# Altium PCB CZ101_Weld_V1.0.PcbDoc
Units mm, origin at the board's own origin, x right, y up, seen from the top; angles counter-clockwise.
Board outline 46 x 48 mm, 2 copper layers (Top Layer, Bottom Layer); 51 components, 31 nets, 122 pads, 0 vias.
Unrouted connection lines stored in the file: 86.
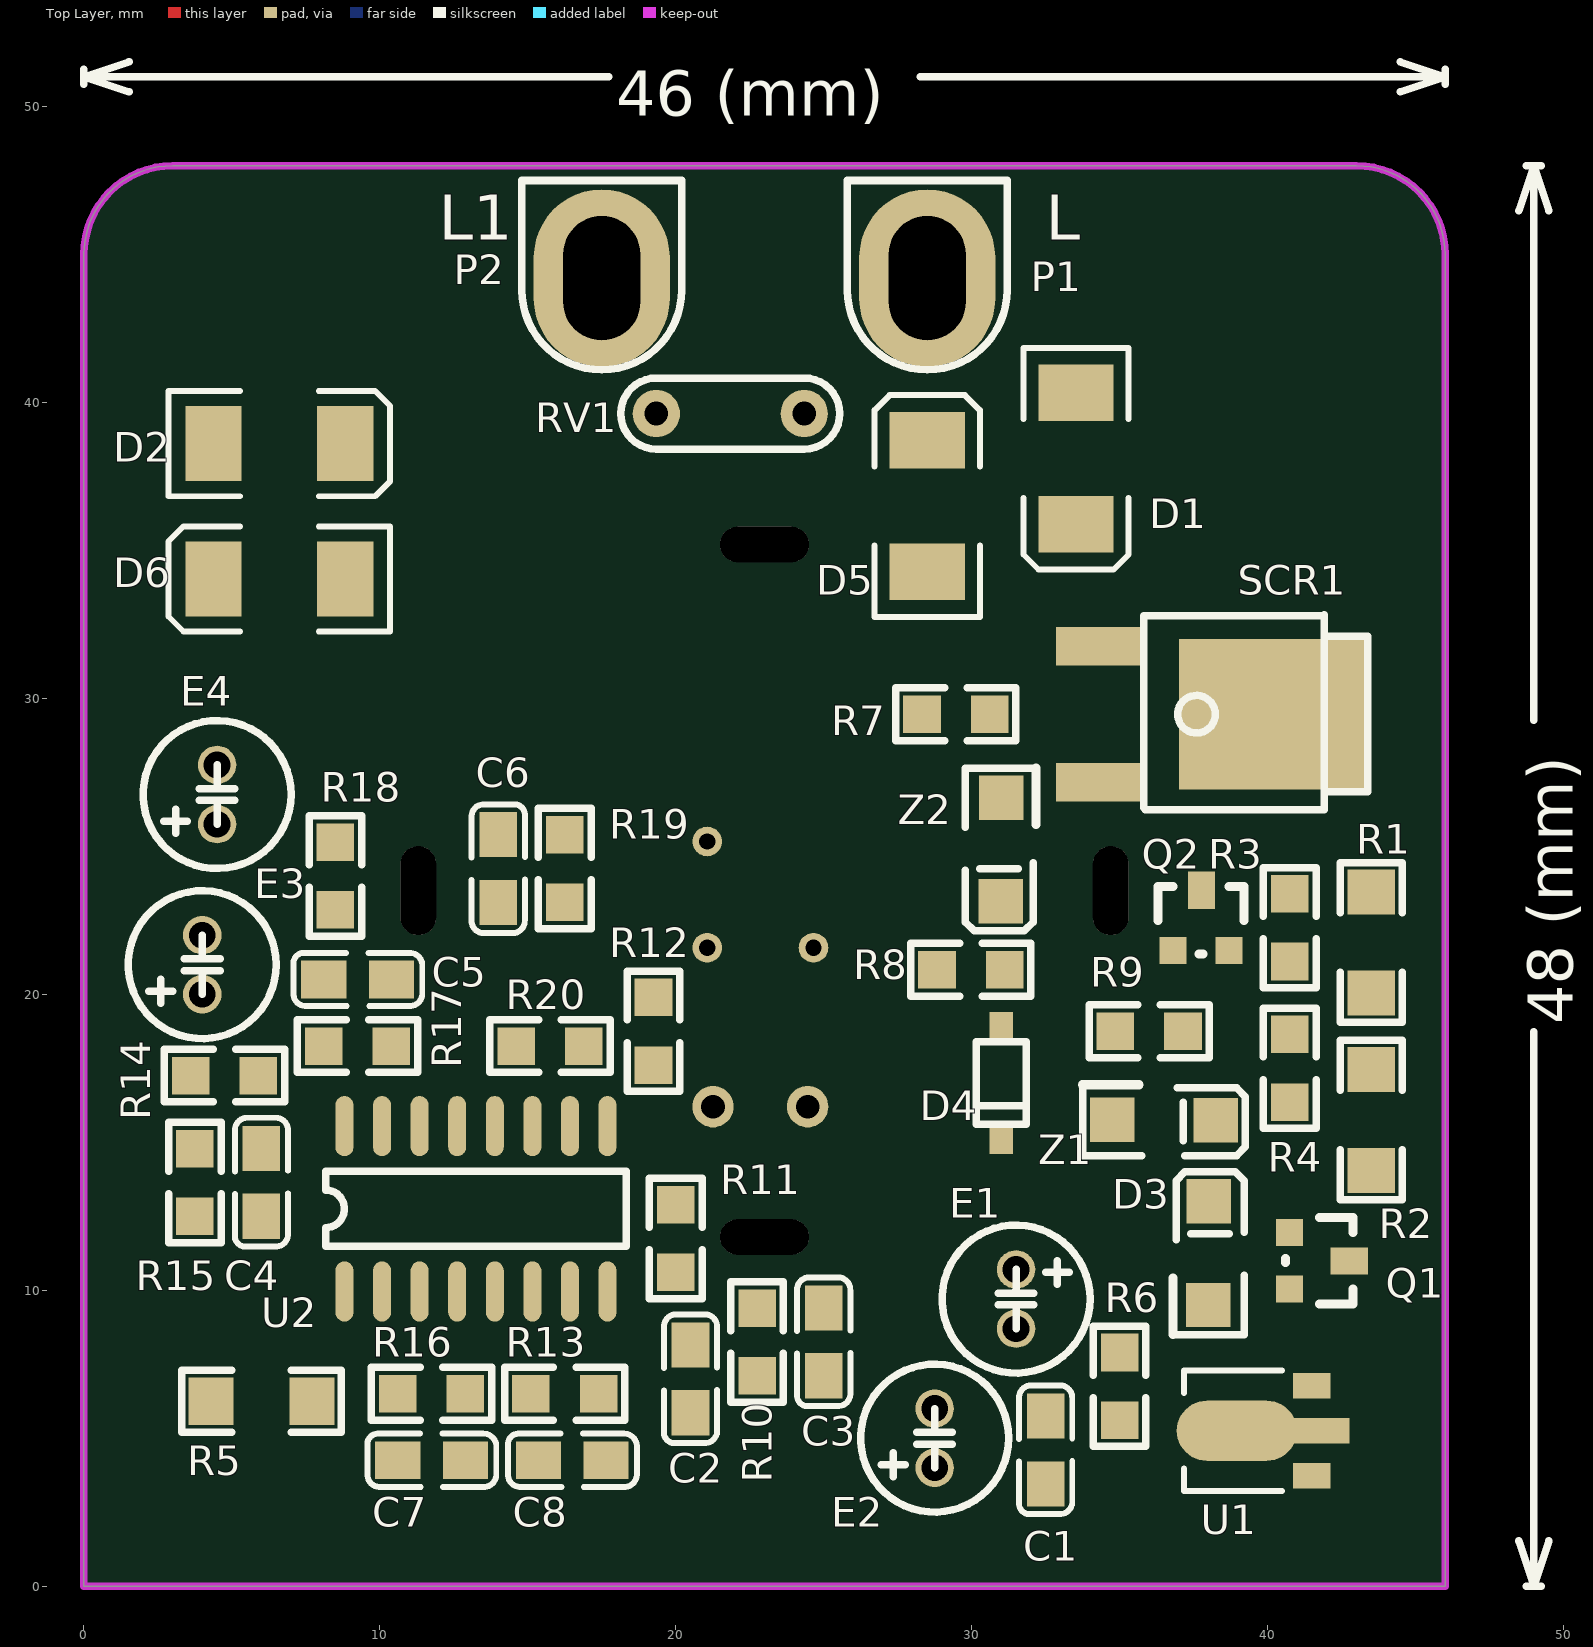
[diagram p0: Top Layer view]
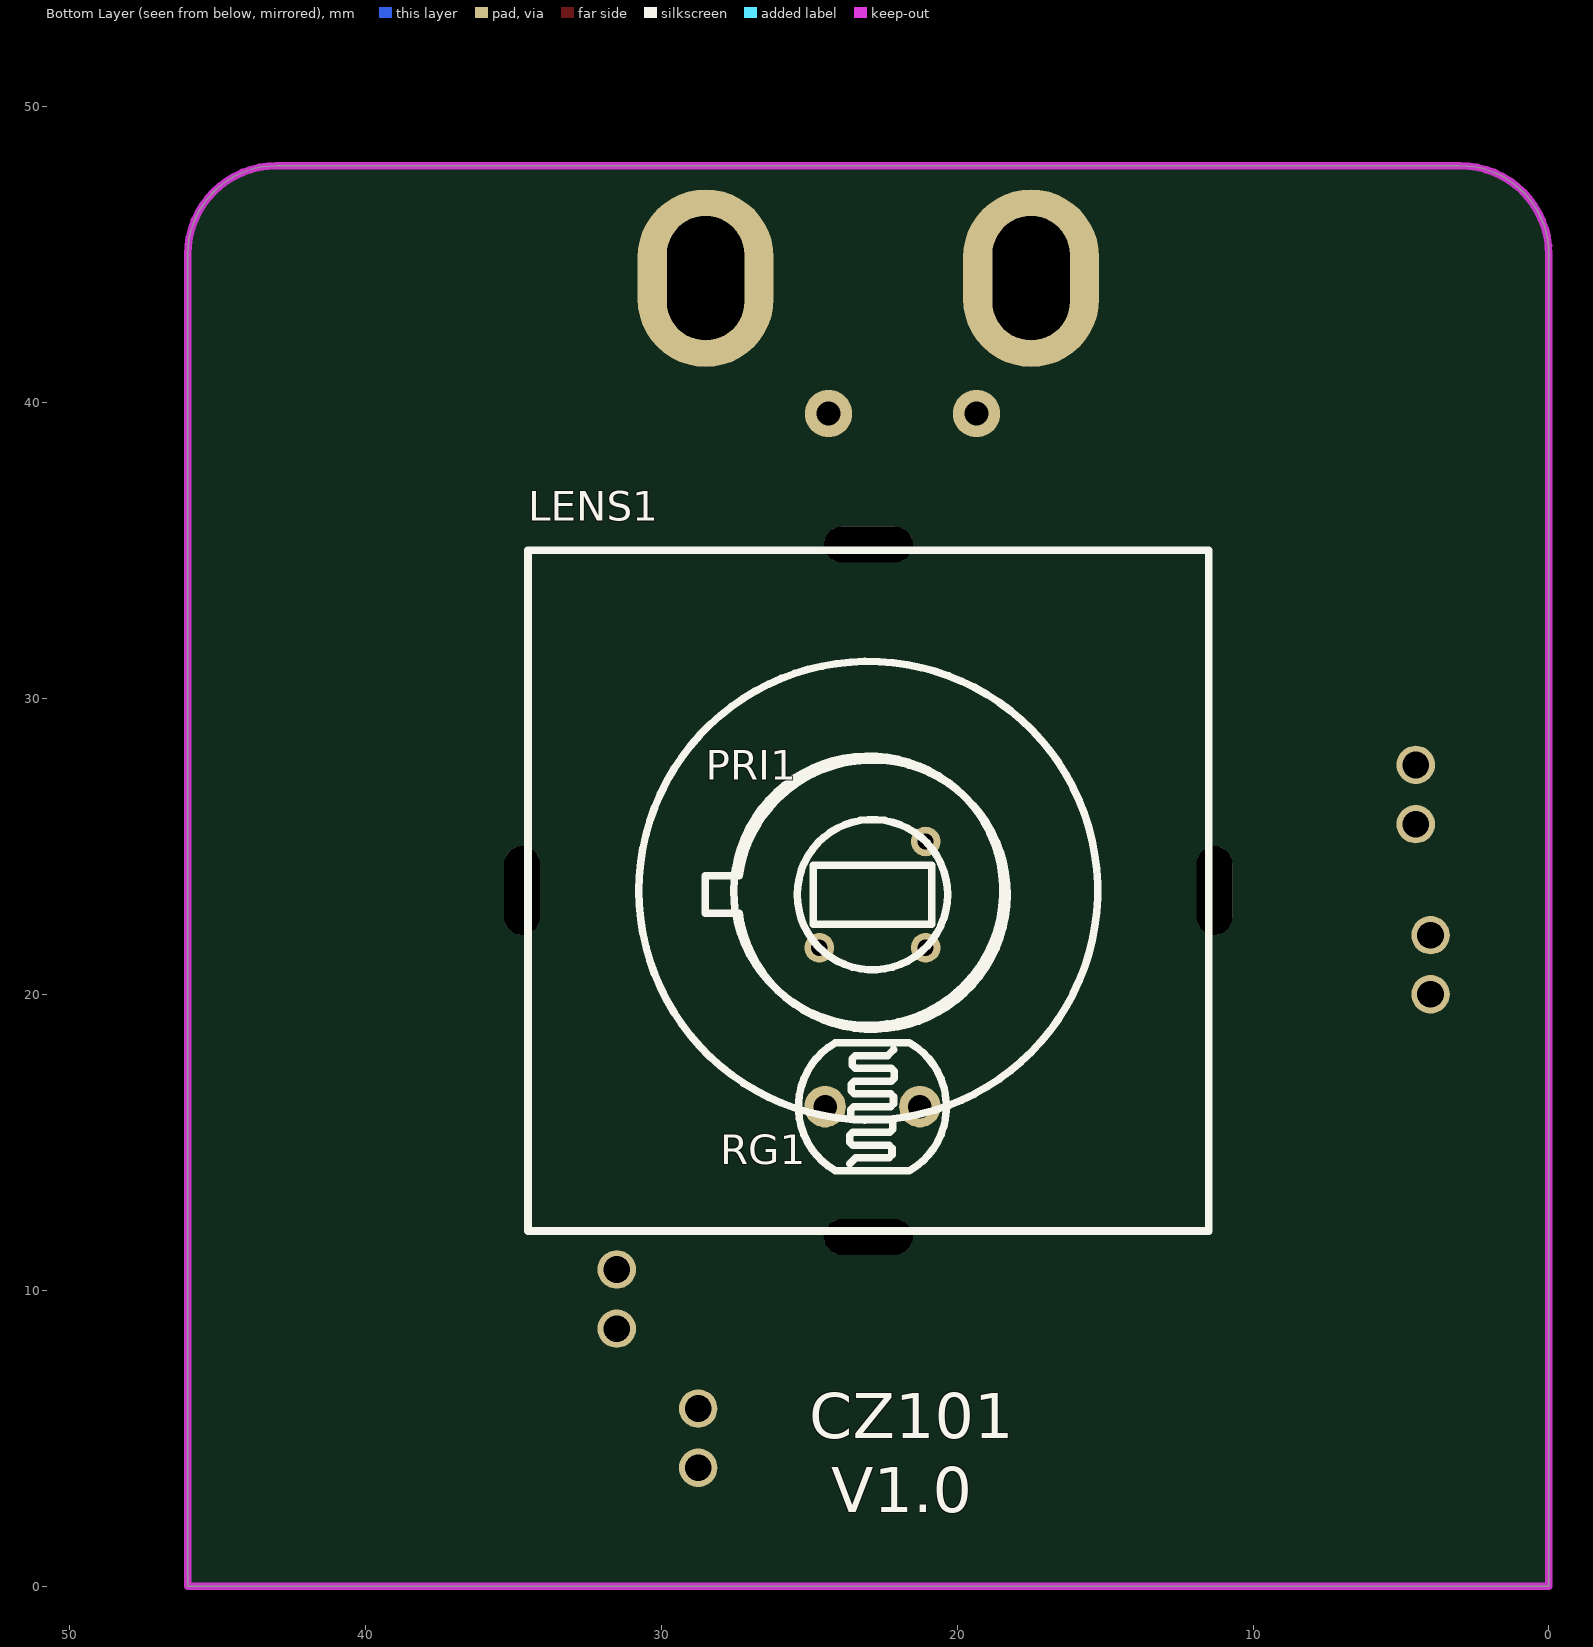
[diagram p1: Bottom Layer view, seen from below]

## Layer stack, top to bottom
Top Layer: signal copper 0.0356
Dielectric: dielectric 0.32, FR-4, Dk 4.8
Bottom Layer: signal copper 0.0356

## Board outline
0,0 46,0 46,45 ccw(c43,45) 43,48 3,48 ccw(c3,45) 0,45

## Design rules (kind name [scope] priority, off if disabled: settings)
Clearance "InPolygon to Keep-Out Layer" [InPolygon vs OnLayer('Keep-Out Layer')] p1: gap=1
Clearance "GND to +3.3V" [InNet('GND') vs InNet('+3.3V')] p2: gap=0.381
Clearance "GND to All" [InNet('GND')] p3: gap=0.305
Clearance [All] p4: gap=0.254
HoleSize [All] p1: absolutevalues=TRUE maxlimit=25.4 minlimit=0.025 maxpercent=80.000 minpercent=20.000
MinimumSolderMaskSliver [All] p1: minsoldermaskwidth=0
PolygonConnect [All] p1: connectstyle=Direct reliefconductorwidth=0.254 reliefentries=4 polygonreliefangle="90 Angle"
RoutingVias [All] p1: holewidth=0.711 width=1.27 viastyle="Through Hole" minholewidth=0.711 minwidth=1.27 maxholewidth=0.711 maxwidth=1.27
SilkToSilkClearance [All] p1: silktosilkclearance=0
SilkscreenOverComponentPads [All] p1: minsilkscreentomaskgap=0
SolderMaskExpansion [All] p1: expansion=0.102
Width [All] p1: maxlimit=25.4 minlimit=0.254 preferedwidth=0.254
24 further rules are at their usual default settings.

## Components (designator, comment, footprint, x,y, rotation, side; value= is the part's Value field where it differs from the comment)
C1 "100nF" 0805_C1 32.5,4.6 r270 top
C2 "100nF" 0805_C1 20.5,7 r270 top
C3 "100nF" 0805_C1 25,8.25 r270 top
C4 "10nF" 0805_C1 6,13.643 r270 top
C5 "10nF" 0805_C1 9.25,20.5 r180 top
C6 "10nF" 0805_C1 14,24.25 r90 top
C7 "10nF" 0805_C1 11.75,4.25 r180 top
C8 "100nF" 0805_C1 16.5,4.25 r180 top
D1 "M7" DO-214AC(SMA) 33.528,38.1 r90 top
D2 "M7" DO-214AC(SMA) 6.604,38.608 r180 top
D3 "IN4148" LL-34 38,11.25 r270 top
D4 "1N4007W/A7" SOD-123 31,17 r90 top
D5 "M7" DO-214AC(SMA) 28.5,36.5 r270 top
D6 "M7" DO-214AC(SMA) 6.604,34.036 r0 top
E1 "47uF/25V" CS_47uF/25V 31.5,9.7 r270 top
E2 "47uF/25V" CS_47uF/25V 28.75,5 r90 top
E3 "22uF/50V" CS_47uF/25V 4,21 r90 top
E4 "22uF/50V" CS_47uF/25V 4.5,26.75 r90 top
LENS1 "Fresnel lens" "Fresnel lens" 23,23.5 r180 bottom locked
P1 "L" CP3M*8.8 28.5,47.5 r180 top locked
P2 "L1" CP3M*8.8 17.5,47.5 r180 top locked
PRI1 "D203S" D203S 22.86,23.368 r315 bottom locked
Q1 "MMBTA44/3D" SOT-23 41.75,11 r270 top
Q2 "MCR100-6/MCR16" SOT-23 37.75,22.5 r0 top
R1 "200K" 1206_R 43.5,21.75 r270 top
R2 "200K" 1206_R 43.5,15.75 r270 top
R3 "20M" 0805_R 40.75,22.25 r270 top
R4 "20M" 0805_R 40.75,17.5 r270 top
R5 "10K" 1206_R 6,6.25 r0 top
R6 "510R" 0805_R 35,6.75 r270 top
R7 "47K" 0805_R 29.464,29.464 r0 top
R8 "1K" 0805_R 29.972,20.828 r0 top
R9 "47K" 0805_R 36,18.75 r0 top
R10 "10K" 0805_R 22.75,8.25 r270 top
R11 "1M" 0805_R 20,11.75 r270 top
R12 "180K" 0805_R 19.25,18.75 r270 top
R13 "1M" 0805_R 16.25,6.5 r180 top
R14 "10K" 0805_R 4.75,17.25 r180 top
R15 "1.5M" 0805_R 3.75,13.643 r270 top
R16 "180K" 0805_R 11.75,6.5 r180 top
R17 "2M" 0805_R 9.25,18.25 r0 top
R18 "47K" 0805_R 8.5,24 r270 top
R19 "47K" 0805_R 16.25,24.25 r270 top
R20 "1.5M" 0805_R 15.75,18.25 r0 top
RG1 "GL5528" R5537 22.86,16.2 r180 bottom locked
RV1 "07D471K" RV-5MM 21.844,39.624 r0 top
SCR1 "BT136" TO-252 37.592,29.464 r270 top
U1 "HT7533-1" SOT-89 41.5,5.25 r90 top
U2 "BISS0001" SO-16 13.25,12.75 r90 top
Z1 "ZMM5V6" LL-34 36.5,15.75 r180 top
Z2 "ZMM5V6" LL-34 30.988,24.892 r90 top

## Footprints (in the part's own frame and the unit in brackets; to place one, negate y for a bottom-side part, rotate by r counter-clockwise, add the part's x,y. Pads: shape width x height; smd on the part's side, far side on the other; paste and mask are expansions set on the pad)
0805_C1 [mil]
  rect 60x50 smd: 1(-45,0) 2(45,0)
  silkscreen extent -86,-35 85,35
0805_R [mil] "SMD Resistor"
  rect 50x50 smd: 1(-45,0) 2(45,0)
  silkscreen extent -80,-35 80,35
1206_R [mm] "SMD Resistor"
  rect 1.52x1.6 smd: 1(-1.71,0) 2(1.71,0)
  silkscreen extent -2.7,-1.05 2.7,1.05
CP3M*8.8 [mm]
  oval 4.6x6 hole 2.6 slot 4.2 at 90 deg: 1(0,3.3)
  silkscreen extent -2.7,0 2.7,6.4
CS_47uF/25V [mm] "PTH  Electrolytic  Capacitor"
  round 1.3 hole 0.9: 1(-1,0) 2(1,0)
  silkscreen extent -2.5,-2.5 2.5,2.5
D203S [mm] "D203S, KP500BP"
  round 1 hole 0.55: 1(2.54,0) 2(0,2.54) 3(-2.54,0)
  silkscreen extent -4.55,-4.55 4.55,4.55
DO-214AC(SMA) [mil] "SMD Diode"
  rect 75x100 smd: A(87.5,0) K(-87.5,0)
  silkscreen extent -147,-70 148,70
"Fresnel lens" [mm]
  oval 1.2x3 hole 1.2 slot 3 at 90 deg unplated: 0(-11.7,0) 0(11.7,0)
  oval 3x1.2 hole 1.2 slot 3 at 0 deg unplated: 0(0,-11.7) 0(0,11.7)
  silkscreen extent -11.5,-11.5 11.5,11.5
LL-34 [mm] "SMD Diode"
  rect 1.5x1.5 smd: A(1.75,-0.008) K(-1.75,0.008)
  silkscreen extent -2.75,-1.19 2.75,1.21
R5537 [mm] "PTH Light dependent resistors"
  round 1.4 hole 0.8: 1(-1.6,0) 2(1.6,0)
  silkscreen extent -2.5,-2.17 2.5,2.17
RV-5MM [mm]
  round 1.6 hole 0.8: 1(-2.5,0) 2(2.5,0)
  silkscreen extent -3.7,-1.2 3.7,1.2
SO-16 [mil]
  oval 80x24 smd: 1(-110,175) 2(-110,125) 3(-110,75) 4(-110,25) 5(-110,-25) 6(-110,-75) 7(-110,-125) 8(-110,-175) 9(110,-175) 10(110,-125) 11(110,-75) 12(110,-25) 13(110,25) 14(110,75) 15(110,125) 16(110,175)
  silkscreen extent -50,-200 50,200
SOD-123 [mm] "SMD Diode"
  rect 1x0.8 smd: A(1.9,0) K(-1.9,0)
  silkscreen extent -1.4,-0.85 1.4,0.85
SOT-23 [mil] "SMD Triode Or Diode"
  rect 36x36 smd: 1(-37.5,-40) 2(37.5,-40)
  rect 36x50 smd: 3(0.5,40)
  silkscreen extent -58,-45 58,45
SOT-89 [mil] "SMD Diode"
  rect 34x50 smd: 1(-60,0) 3(60,0)
  oval 80x160 smd: 2(0,100)
  rect 34x100 smd: 2(0,0)
  silkscreen extent -80,40 80,170
TO-252 [mm] "SMD IC"
  rect 1.3x3 smd: 1(-2.3,-3.245) 3(2.3,-3.245)
  rect 5.08x6.35 smd: 2(0,2.592)
  silkscreen extent -3.35,-1.78 3.22,5.79

## Part data
C1 C2 C3 C4 C5 C6 C7 C8: library part Cap1
D1 D2 D4 D5 D6: library part Diode-A, "SS14,SS24,SS34,M7"
D3 Z1 Z2: library part Diode-B
E1 E2 E3 E4: library part "Cap Pol1"
P1 P2: library part "Header 1", "Header, 1-Pin"
PRI1: "D203S, KP500BP"
Q1: library part 8050
Q2: library part MCR100-8, "Silicon Controlled Rectifier"
R1 R2 R3 R4 R5 R6 R7 R8 R9 R10 R11 R12 R13 R14 R15 R16 R17 R18 R19 R20: library part Res1
RG1: library part GL5539
RV1: library part "Res Piezo Varistor"
SCR1: library part TRIAC
U1: library part HT7833, "HT7533; Output 500mA; Iq: 5uA, max= 7uA"
U2: "BISS0001, CSC0001"

## Nets (pads, with @x,y where several pads share a name; then routed paths per layer and width w, separated by ;. In a path a pad name is that pad's centre, name@x,y a point inside that pad or via, vN(x,y) a via of type N, cw(c..) or ccw(c..) an arc to the next point about the centre after c; other vN are vias at no path point)
+3.3V: C2.1 E2.1 R10.2 R11.2 U1.3 U2.1 U2.8 U2.11
GND: C1.2 C2.2 C3.2 C6.2 C7.2 C8.1 D5.A D6.A E1.2 E2.2 E4.2 PRI1.3 R7.1 R8.1 R9.1 R19.1 R20.1 RG1.1 SCR1.1 U1.1 U2.7 Z1.A
L: D1.A D5.K P1.1 RV1.2
L1: D2.A D6.K P2.1 RV1.1
LAMP_CTR: R5.2 U2.2
NetC1_1: C1.1 R6.2 U1.2
NetC3_1: C3.1 PRI1.1 R10.1
NetC4_1: C4.1 R14.2 R15.1 U2.13
NetC4_2: C4.2 R15.2 U2.12
NetC5_1: C5.1 R17.2 R18.2 U2.15
NetC5_2: C5.2 E3.2 R17.1 U2.16
NetC6_1: C6.1 PRI1.2 R19.2 U2.14
NetC7_1: C7.1 R16.1 U2.4
NetC8_2: C8.2 R13.2 U2.5
NetD1_K: D1.K D2.K Q2.3 R1.1 R3.1 SCR1.2
NetD3_A: D3.A R5.1
NetD3_K: D3.K Q2.2 R9.2
NetD4_A: D4.A Q2.1 R8.2 Z2.K
NetD4_K: D4.K E1.1 Q1.2 R6.1
NetE3_1: E3.1 R14.1
NetE4_1: E4.1 R18.1
NetQ1_1: Q1.1 R4.2 Z1.K
NetQ1_3: Q1.3 R2.2
NetR1_2: R1.2 R2.1
NetR3_2: R3.2 R4.1
NetR7_2: R7.2 SCR1.3 Z2.A
NetR11_1: R11.1 R12.2 U2.9
NetR12_1: R12.1 RG1.2
NetR13_1: R13.1 U2.6
NetR16_2: R16.2 U2.3
NetR20_2: R20.2 U2.10
pads on no net: LENS1.0

## Keep-outs
Keep-Out Layer:
  the board outline again, w0.254

## Silkscreen, mask and mechanical layers (free items; w line width, h text height)
Top Overlay:
  lines w0.254: 0,50.746 0,51.254 ; 1.524,50.492 0,51 ; 1.524,51.508 0,51 ; 17.736,51 0,51 ; 28.264,51 46,51 ; 44.476,50.492 46,51 ; 44.476,51.508 46,51 ; 46,50.746 46,51.254 ; 48.492,1.524 49,0 ; 48.492,46.476 49,48 ; 48.746,0 49.254,0 ; 48.746,48 49.254,48 ; 49,18.736 49,0 ; 49,29.264 49,48 ; 49.508,1.524 49,0 ; 49.508,46.476 49,48
  text "46 (mm)" at 17.99,49.687 h1.52
  text "L1" at 12,45.5 h1.52
  text "L" at 32.5,45.5 h1.52
  text "48 (mm)" at 50.313,18.99 h1.52 r90
Bottom Overlay:
  text "CZ101" at 25,5 h1.52
  text "V1.0" at 24.25,2.5 h1.52